# Altium PCB remora-2.PcbDoc (part 1 of 2)
Units mm, origin at the board's own origin, x right, y up, seen from the top; angles counter-clockwise.
Board outline 127 x 44.45 mm, 4 copper layers (Top Layer, GND, VCC, Bottom Layer), stack 0.778 mm thick; 128 components, 115 nets, 566 pads, 152 vias.
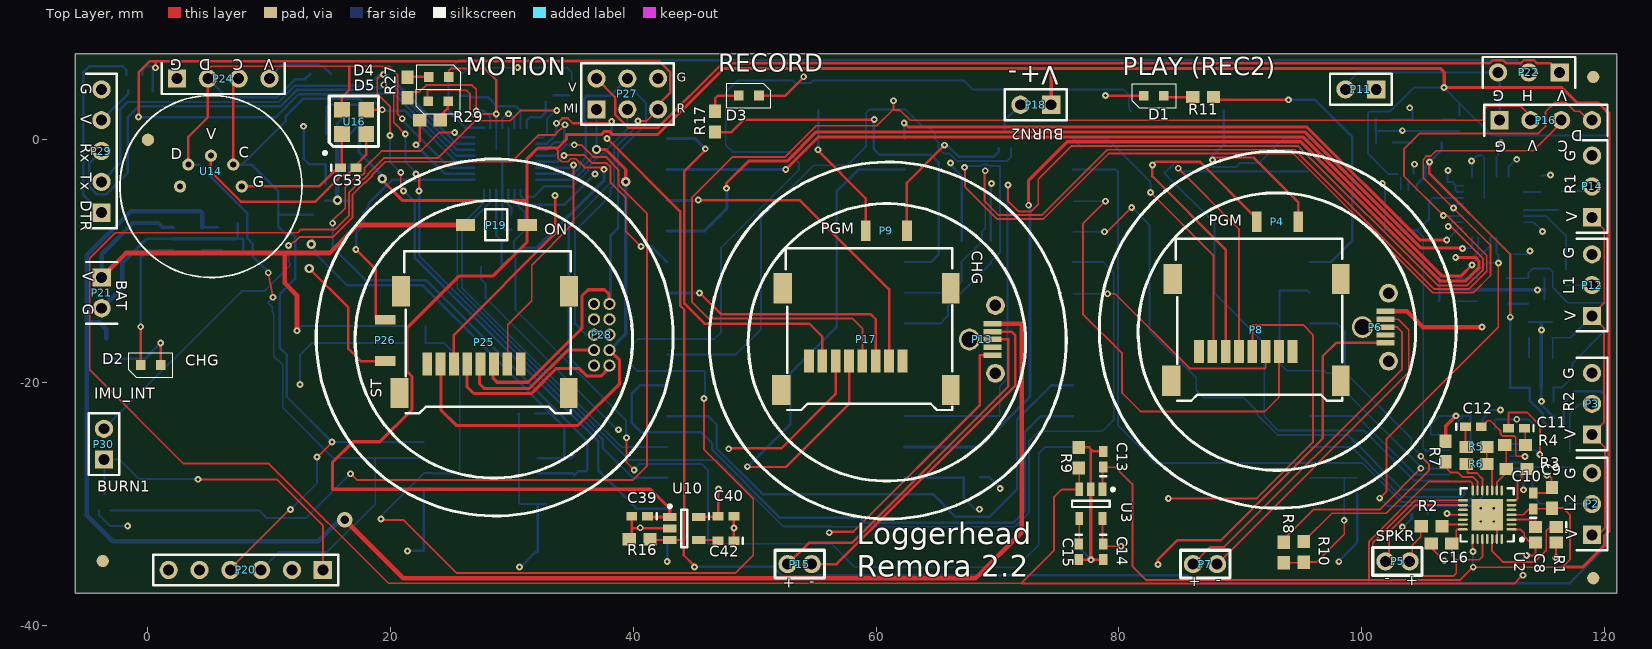
[diagram p0: Top Layer view]
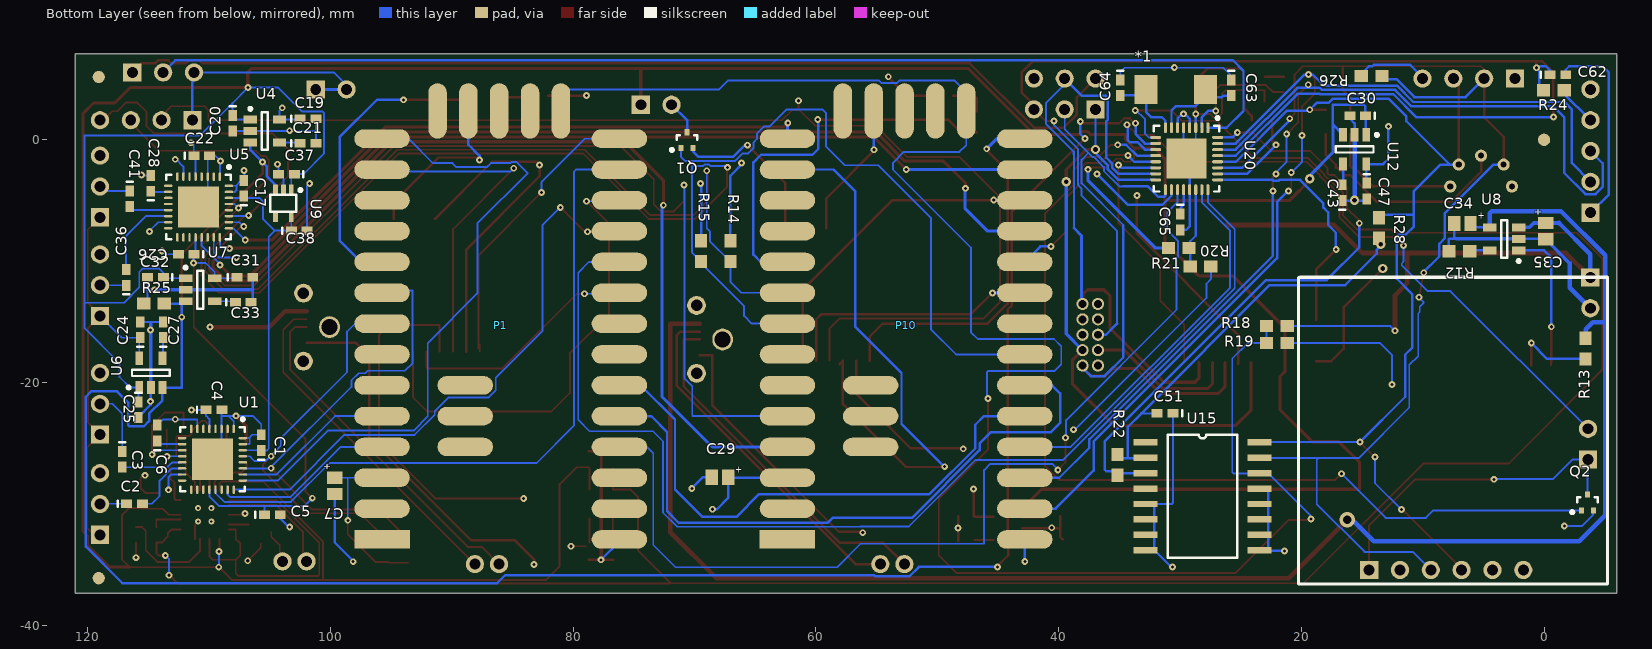
[diagram p1: Bottom Layer view, seen from below]
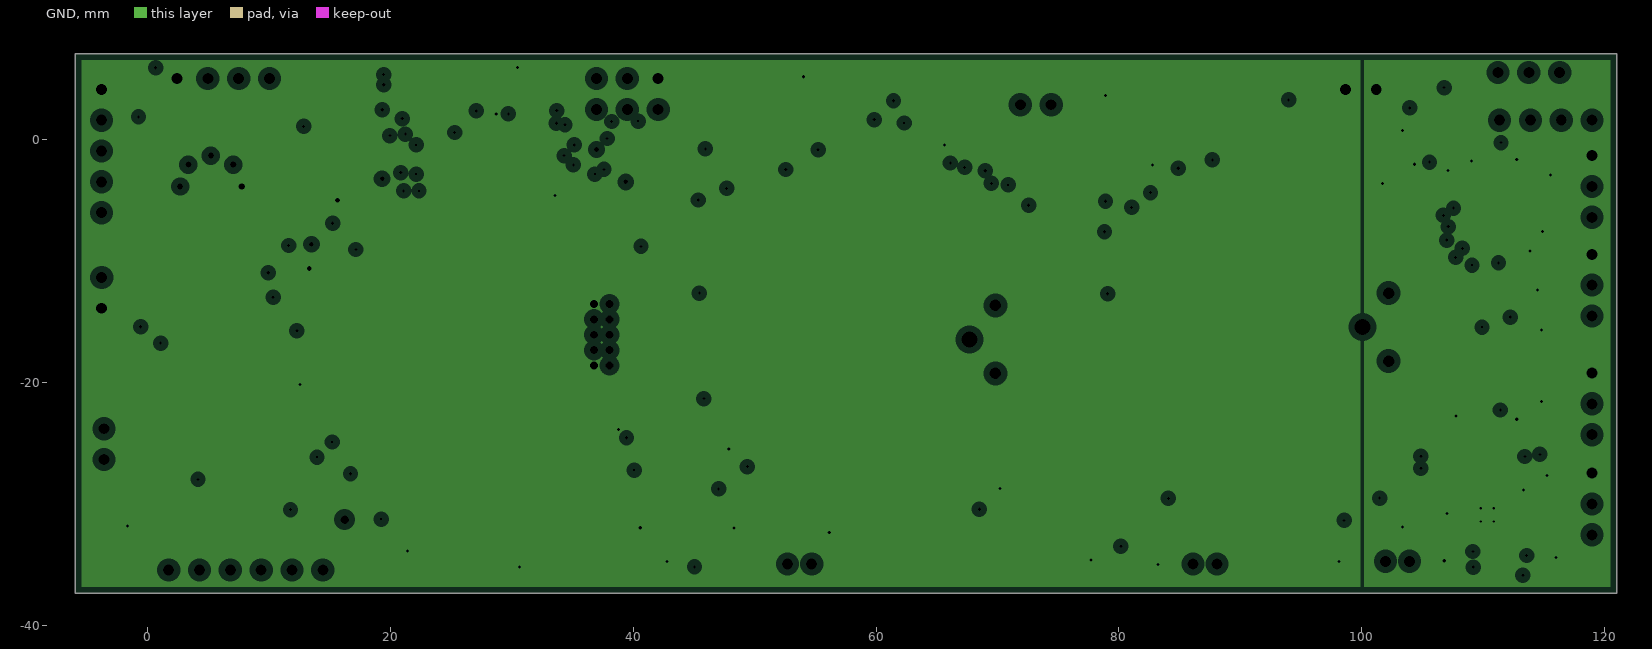
[diagram p2: GND, clearances drawn from the general rule]
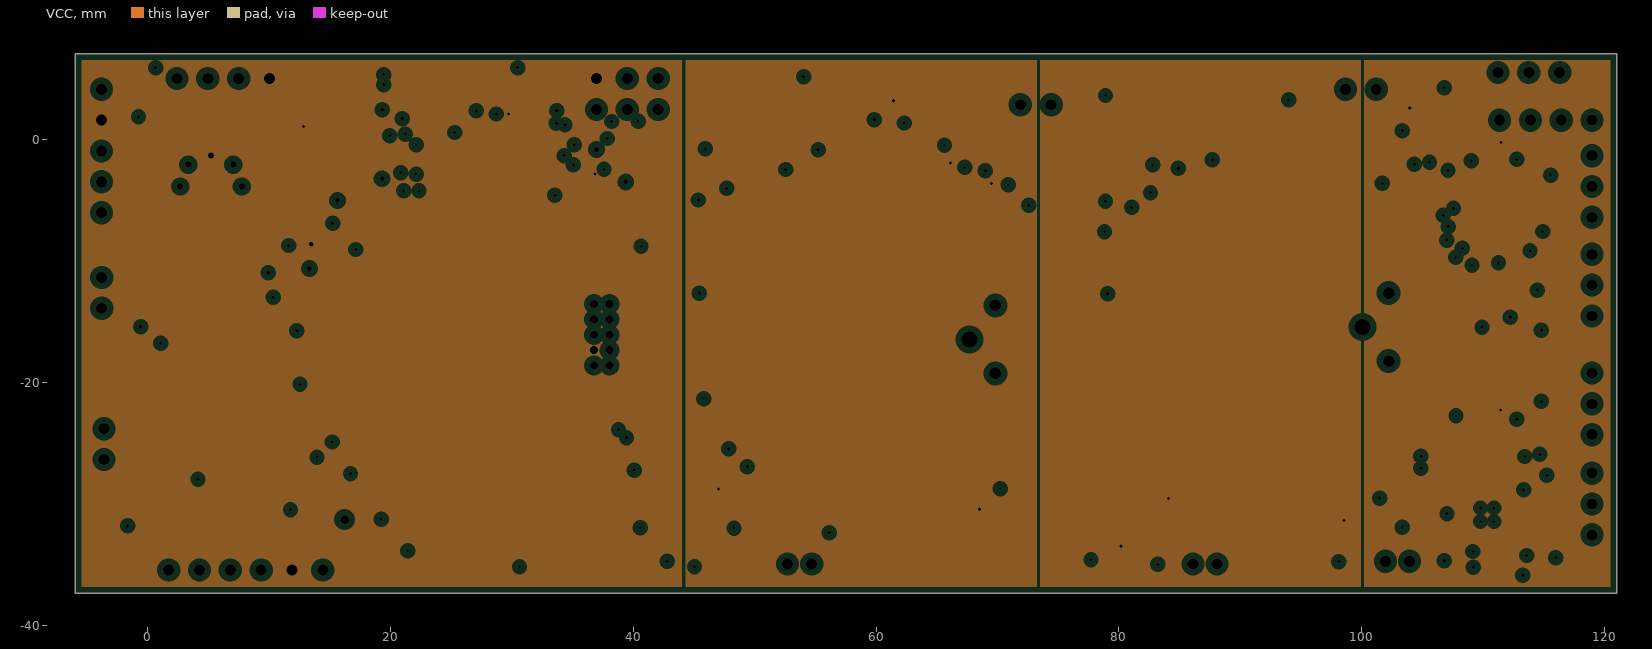
[diagram p3: VCC, clearances drawn from the general rule]

## Layer stack, top to bottom
Top Solder: solder mask 0.0102, Solder Resist, Dk 3.5
Top Layer: signal copper 0.0356
Dielectric 1: core 0.254, FR-4, Dk 4.2
GND: plane copper 0.036, net (Multiple Nets)
Dielectric 3: prepreg 0.127, Dk 4.2
VCC: plane copper 0.036, net (Multiple Nets)
Dielectric 2: core 0.254, Dk 4.2
Bottom Layer: signal copper 0.0356
Bottom Solder: solder mask 0.0102, Solder Resist, Dk 3.5

## Board outline
-5.986,-37.373 -5.986,7.077 121.014,7.077 121.014,-37.373

## Design rules (kind name [scope] priority, off if disabled: settings)
Clearance [All] p1: gap=0.152 ignorepadtopadclearanceinfootprint=FALSE except(0: Arc-Hole Track-Hole SMDPad-Hole THPad-Hole Via-Hole Fill-Hole Poly-Hole Region-Hole Text-Hole)
MinimumSolderMaskSliver [All] p1: minsoldermaskwidth=0.051
PlaneClearance [All] p1: clearance=0.508
PlaneConnect [All] p1: planeconnectstyle=Relief reliefexpansion=0.508 reliefentries=4 reliefconductorwidth=0.254 reliefairgap=0.254
PolygonConnect [All] p1: connectstyle=Relief reliefconductorwidth=0.254 reliefentries=4 polygonreliefangle="90 Angle" airgapwidth=0.254
RoutingVias [All] p1: holewidth=0.381 width=0.762 viastyle="Through Hole" minholewidth=0.254 minwidth=0.508 maxholewidth=1.016 maxwidth=1.27
SilkToSilkClearance [All] p1: silktosilkclearance=0
SilkToSolderMaskClearance [IsPad] p1: minsilkscreentomaskgap=0 clearancetoexposedcopper=TRUE
SolderMaskExpansion [All] p1: expansion=0.102 istentingtop=FALSE
Width [All] p1: maxlimit=1.27 minlimit=0.152 preferedwidth=0.203
25 further rules are at their usual default settings.

## Classes and differential pairs
component class teensyRecord: C17 C19 C20 C21 C22 C24 C25 C26 C27 C28 C29 C31 C32 C33 C34 C35 C36 C37 C38 C39 C40 C41 C42 D2 D3 P9 P10 P11 P12 P13 P14 P15 P16 P17 P18 Q1 R12 R13 R14 R15 R16 R17 R25 U4 U5 U6 U7 U8 U9 U10
component class teensyPlayback: C1 C2 C3 C4 C5 C6 C7 C8 C9 C10 C11 C12 C13 C14 C15 C16 D1 P1 P2 P3 P4 P5 P6 P7 P8 R1 R2 R3 R4 R5 R6 R7 R8 R9 R10 R11 U1 U2 U3
component class remora-2-power: C30 C43 C47 P19 P21 R18 R19 R20 R21 U12
component class remora-2-sensors: C51 C53 P20 P22 P24 P30 Q2 R22 U14 U15 U16
component class remora-2: *1 C62 C63 C64 C65 D4 D5 P25 P26 P27 P28 P29 R24 R26 R27 R28 R29 U20

## Components (designator, comment, footprint, x,y, rotation, side; value= is the part's Value field where it differs from the comment)
*1 "8MHz" XTAL-ABM3 30.352,4.156 r0 bottom
C1 "0.1uF" 0402 105.688,-24.953 r90 bottom
C2 "1.0uF" 0402 116.128,-29.982 r180 bottom value=0.1uF
C3 "1.0uF" 0402 117.144,-26.324 r270 bottom value=0.1uF
C4 "0.1uF" 0402 109.584,-22.26 r180 bottom
C5 "0.1uF" 0402 104.774,-30.896 r180 bottom
C6 "0.1uF" 0402 114.274,-24.165 r90 bottom
C7 "10uF" Tant0805 99.643,-28.509 r90 bottom
C8 "C0603" 0603 115.172,-31.912 r180 top value=4.7uF
C9 "C0603" 0603 115.68,-29.499 r270 top value=10uF
C10 "0.1uF" 0402 114.156,-29.753 r90 top
C11 ".47uF" 0402 112.759,-23.784 r180 top value=0.1uF
C12 "0.47uF" 0402 109.203,-23.657 r0 top value=0.1uF
C13 "1uF" 0402 78.723,-26.324 r90 top value=0.1uF
C14 "1uF" 0402 78.723,-33.944 r270 top value=0.1uF
C15 "0.01uF" 0402 76.691,-33.944 r270 top value=0.1uF
C16 "C0603" 0603 106.577,-33.258 r0 top value=10uF
C17 "0.1uF" 0402 107.136,-3.998 r90 bottom
C19 "1.0uF" 0402 101.837,1.743 r180 bottom value=0.1uF
C20 "1uF" 0402 108.06,1.362 r270 bottom value=0.1uF
C21 "0.01uF" 0402 101.837,-0.289 r180 bottom value=0.1uF
C22 "0.1uF" 0402 110.6,-1.305 r180 bottom
C24 "1.0uF" 0402 115.68,-15.656 r90 bottom value=0.1uF
C25 "1uF" 0402 115.807,-22.245 r270 bottom value=0.1uF
C26 "0.1uF" 0402 111.87,-9.433 r0 bottom
C27 "0.01uF" 0402 113.775,-15.656 r90 bottom value=0.1uF
C28 "0.1uF" 0402 114.791,-3.591 r90 bottom
C29 "10uF" Tant0805 67.893,-27.797 r180 bottom
C30 "1.0uF" 0402 15.35,1.997 r0 bottom value=0.1uF
C31 "1.0uF" 0402 107.044,-11.338 r180 bottom value=0.1uF
C32 "1uF" 0402 114.41,-11.338 r0 bottom value=0.1uF
C33 "0.01uF" 0402 107.171,-13.37 r180 bottom value=0.1uF
C34 "1uF" Tant0805 6.73,-6.893 r180 bottom
C35 "1uF" Tant0805 -0.144,-7.528 r90 bottom
C36 "1.0uF" 0402 116.823,-11.338 r90 bottom value=0.1uF
C37 "1.0uF" 0402 103.615,-2.829 r0 bottom value=0.1uF
C38 "1.0uF" 0402 102.564,-7.477 r180 bottom value=0.1uF
C39 "1uF" 0402 40.512,-31.023 r180 top value=0.1uF
C40 "1uF" 0402 47.624,-31.007 r0 top value=0.1uF
C41 "1.0uF" 0402 116.509,-4.861 r270 bottom value=0.1uF
C42 ".01uF" 0402 47.624,-33.039 r180 top value=0.1uF
C43 "0.01uF" 0402 16.62,-4.353 r90 bottom value=0.1uF
C47 "1.ouF" 0402 14.604,-4.226 r270 bottom value=0.1uF
C51 "0.1uF" 0402 31.225,-22.54 r0 bottom value=10nF
C53 "0.1uF" 0402 16.509,-2.321 r0 top
C62 "0.1uF" 0402 -1.135,5.35 r180 bottom
C63 "100pF" 0402 25.779,4.283 r270 bottom
C64 "100pF" 0402 34.924,4.283 r270 bottom
C65 "0.1uF" 0402 29.955,-6.766 r270 bottom
D1 "LED_0603" Diode0603 82.879,3.622 r180 top
D2 "LED_0603" Diode0603 0.237,-18.552 r180 top
D3 "LED_0603" Diode0603 49.513,3.648 r0 top
D4 "LED_0603" Diode0603 23.961,5.172 r0 top
D5 "LED_0603" Diode0603 23.91,3.165 r180 top
P1 "Teensy Surface" TEENSY3.2_surface_mount 85.962,-15.275 r180 bottom
P2 "HYDROPHONE" HDR1X3 118.982,-32.547 r90 top
P3 "HYDROPHONE" HDR1X3 118.982,-24.292 r90 top
P4 "Tactile" Tactile-B3U-1000 93.065,-6.766 r0 top
P5 "PIEZO" HDR_2x1_2mm 103.961,-34.732 r90 top
P6 "microUSB-vert" MICROUSB-VERT 101.964,-14.132 r270 top
P7 "USB" HDR_2x1_2mm 86.089,-34.96 r270 top
P8 "microSD-Molex" microSD_Molex_hinged 84.819,-19.847 r90 top
P9 "Tactile" Tactile-B3U-1000 60.832,-7.503 r180 top
P10 "Teensy Surface" TEENSY3.2_surface_mount 52.561,-15.275 r180 bottom
P11 "GND Tie" HDR1X2 101.202,4.156 r180 top
P12 "HYDROPHONE" HDR1X3 118.982,-14.513 r90 top
P13 "microUSB-vert" MICROUSB-VERT 69.579,-15.148 r270 top
P14 "HYDROPHONE" HDR1X3 118.982,-6.385 r90 top
P15 "USB" HDR_2x1_2mm 52.688,-34.96 r270 top
P16 "Display" HDR1X4 111.362,1.616 r0 top
P17 "microSD-Molex" microSD_Molex_hinged 52.688,-20.609 r90 top
P18 "Battery" HDR1X2 74.421,2.886 r180 top
P19 "DIP1" DIP1 26.161,-7.02 r0 top
P20 "Header 6" HDR1X6 14.41,-35.443 r180 top
P21 "Battery" HDR1X2 -3.811,-11.338 r270 top
P22 "Header 3" HDR1X3 116.315,5.553 r180 top
P24 "Header 4" HDR1X4 2.396,5.045 r0 top
P25 "microSD-Molex" microSD_Molex_hinged 21.233,-20.863 r90 top
P26 "Tactile" Tactile-B3U-1000 19.557,-16.52 r90 top
P27 "AVR SPI" HDR2X3 36.956,2.505 r0 top
P28 "Custom program 2x5" Header_2x5_50mil 38.023,-13.523 r180 top
P29 "Header 5" HDR1X5 -3.827,-6.004 r90 top
P30 "Header 2" HDR1X2 -3.624,-26.35 r90 top
Q1 "DMN5L06TK-7" SOT-523 70.611,-0.035 r90 bottom
Q2 "DMN5L06TK-7" SOT-523 -3.573,-29.88 r90 bottom
R1 "20k" 3-0603 115.172,-33.182 r180 top
R2 "10X" 3-0603 105.765,-31.836 r180 top
R3 "10K" 3-0603 112.775,-27.137 r0 top
R4 "10K" 3-0603 112.648,-25.156 r180 top
R5 "10K" 3-0603 109.457,-25.308 r0 top
R6 "10K" 3-0603 109.457,-26.705 r180 top
R7 "100K" 3-0603 106.917,-25.689 r270 top
R8 "4.7k" 3-0603 93.582,-33.995 r270 top
R9 "20k" 3-0603 76.691,-26.197 r270 top
R10 "4.7k" 3-0603 95.233,-33.944 r270 top
R11 "330" 3-0603 86.943,3.521 r180 top
R12 "2k" 3-0603 6.984,-9.179 r180 bottom
R13 "330" 3-0603 -3.421,-17.206 r270 bottom
R14 "4.7k" 3-0603 67.039,-9.179 r90 bottom
R15 "4.7k" 3-0603 69.452,-9.179 r90 bottom
R16 "20k" 3-0603 40.512,-32.912 r0 top
R17 "330" 3-0603 46.735,1.489 r90 top
R18 "33k" 3-0603 22.021,-15.351 r180 bottom
R19 "100k" 3-0603 22.021,-16.748 r0 bottom
R20 "33k" 3-0603 30.098,-8.925 r0 bottom
R21 "100k" 3-0603 28.304,-10.449 r0 bottom
R22 "4.7k" 3-0603 35.137,-26.781 r270 bottom
R24 "10k" 3-0603 -0.804,4.08 r180 bottom
R25 "20k" 3-0603 114.537,-13.497 r0 bottom
R26 "4.7k" 3-0603 14.207,5.248 r0 bottom
R27 "330" 3-0603 21.395,4.308 r90 top
R28 "4.7k" 3-0603 13.588,-7.274 r270 bottom
R29 "330" 3-0603 23.24,1.616 r0 top
U1 "SGTL5000" QFN32 109.711,-26.324 r270 bottom
U2 "MAX9788" MAX9788 110.346,-30.896 r180 top
U3 "LP3985IM5-3.3" MF05A_N 77.683,-30.003 r270 top
U4 "LP3985IM5-3.3" MF05A_N 105.393,0.727 r180 bottom
U5 "SGTL5000" QFN32 110.854,-5.54 r270 bottom
U6 "LP3985IM5-3.3" MF05A_N 114.791,-19.212 r90 bottom
U7 "LP3985IM5-3.3" MF05A_N 110.727,-12.354 r180 bottom
U8 "MCP73831T-2DCI/OT" SOT-23-OT5_N 3.285,-8.163 r0 bottom
U9 "TLV70018DCKR" TI-DCK5_V 103.869,-5.242 r270 bottom
U10 "LP3985IM5-3.3" MF05A_N 44.195,-32.023 r0 top
U12 "LP3985IM5-3.3" MF05A_N 15.604,-0.797 r270 bottom
U14 "Keller7LD" Keller7LD 7.73,-3.845 r180 top
U15 "DS3231" DS3231 32.825,-24.927 r180 bottom
U16 "MS5837" MS5837 15.985,0.473 r90 top
U20 "ATmega8-16AC" 32M1-A_M 29.447,-1.559 r270 bottom

## Footprints (in the part's own frame and the unit in brackets; to place one, negate y for a bottom-side part, rotate by r counter-clockwise, add the part's x,y. Pads: shape width x height; smd on the part's side, far side on the other; paste and mask are expansions set on the pad)
3-0603 [mm] "Chip Resistor; Body 1.6 x 0.9 mm (LxW typ)"
  rect 1.1x1 smd: 1(-0.85,0) 2(0.85,0)
32M1-A_M [mm] "QFN, 32-Leads, Body 5x5mm, Pitch 0.5mm, Thermal Pad 3.3x3.3mm, IPC Low Density"
  oval 0.9x0.25 smd: 1(-2.55,1.75) 2(-2.55,1.25) 3(-2.55,0.75) 4(-2.55,0.25) 5(-2.55,-0.25) 6(-2.55,-0.75) 7(-2.55,-1.25) 8(-2.55,-1.75) 17(2.55,-1.75) 18(2.55,-1.25) 19(2.55,-0.75) 20(2.55,-0.25) 21(2.55,0.25) 22(2.55,0.75) 23(2.55,1.25) 24(2.55,1.75)
  oval 0.25x0.9 smd: 9(-1.75,-2.55) 10(-1.25,-2.55) 11(-0.75,-2.55) 12(-0.25,-2.55) 13(0.25,-2.55) 14(0.75,-2.55) 15(1.25,-2.55) 16(1.75,-2.55) 25(1.75,2.55) 26(1.25,2.55) 27(0.75,2.55) 28(0.25,2.55) 29(-0.25,2.55) 30(-0.75,2.55) 31(-1.25,2.55) 32(-1.75,2.55)
  rect 3.3x3.3 smd paste-1.27: 33(0,0)
  silkscreen extent -3.47,-2.7 2.7,2.7, body extent -2.55,-2.55 2.55,2.55, height 1
0402 [mm] "Chip Capacitor; Body 1.0 x 0.5 mm (LxW typ)"
  rect 0.9x0.7 smd: 1(-0.65,0) 2(0.65,0)
  silkscreen extent -1.4,-0.25 -1.4,0.25
0603 [mm] "Chip Capacitor; Body 1.6 x 0.8 mm (LxW typ)"
  rect 1.1x1 smd: 1(-0.85,0) 2(0.85,0)
  silkscreen extent -1.7,-0.4 -1.7,0.4
Diode0603 [mm]
  rect 0.8x0.8 smd: A(-0.825,0) K(0.825,0)
  silkscreen extent -1.83,-1 1.8,1
DIP1 [mm]
  rect 1.6x1 smd: 1(0,0) 2(5.08,0)
  silkscreen extent 1.63,-1.25 3.45,1.29
DS3231 [mm]
  rect 1.98x0.53 smd: 1(0,0) 2(0,-1.27) 3(0,-2.54) 4(0,-3.81) 5(0,-5.08) 6(0,-6.35) 7(0,-7.62) 8(0,-8.89) 9(9.37,-8.89) 10(9.37,-7.62) 11(9.37,-6.35) 12(9.37,-5.08) 13(9.37,-3.81) 14(9.37,-2.54) 15(9.37,-1.27) 16(9.37,0)
  silkscreen extent 1.83,-9.53 7.54,0.63
HDR1X2 [mm] "Connector; Header; 2 Position"
  rect 1.5x1.5 hole 0.9: 1(0,0)
  round 1.5 hole 0.9: 2(2.54,0)
  silkscreen extent -1.27,-1.27 3.81,1.27
HDR1X3 [mm] "Connector; Header; 3 Position"
  rect 1.5x1.5 hole 0.9: 1(0,0)
  round 1.5 hole 0.9: 2(2.54,0) 3(5.08,0)
  silkscreen extent -1.27,-1.27 6.35,1.27
HDR1X4 [mm] "Connector; Header; 4 Position"
  rect 1.5x1.5 hole 0.9: 1(0,0)
  round 1.5 hole 0.9: 2(2.54,0) 3(5.08,0) 4(7.62,0)
  silkscreen extent -1.27,-1.27 8.89,1.27
HDR1X5 [mm] "Connector; Header; 5 Position"
  rect 1.5x1.5 hole 0.9: 1(0,0)
  round 1.5 hole 0.9: 2(2.54,0) 3(5.08,0) 4(7.62,0) 5(10.16,0)
  silkscreen extent -1.27,-1.27 11.43,1.27
HDR1X6 [mm] "Connector; Header; 6 Position"
  rect 1.5x1.5 hole 0.9: 1(0,0)
  round 1.5 hole 0.9: 2(2.54,0) 3(5.08,0) 4(7.62,0) 5(10.16,0) 6(12.7,0)
  silkscreen extent -1.27,-1.27 13.97,1.27
HDR2X3 [mm] "Connector; Header; 3x2 Position"
  rect 1.5x1.5 hole 0.9: 1(0,0)
  round 1.5 hole 0.9: 2(0,2.54) 3(2.54,0) 4(2.54,2.54) 5(5.08,0) 6(5.08,2.54)
  silkscreen extent -1.27,-1.27 6.35,3.81
HDR_2x1_2mm [mm]
  round 1.5 hole 0.9: 1(0,0.016) 2(0,2)
  silkscreen extent -1.14,-1.02 1.14,3.05
Header_2x5_50mil [mm]
  round 1 hole 0.65: 1(0,0) 2(1.27,0) 3(0,1.27) 4(1.27,1.27) 5(0,2.54) 6(1.27,2.54) 7(0,3.81) 8(1.27,3.81) 9(0,5.08) 10(1.27,5.08)
Keller7LD [mm]
  round 1 hole 0.5: 1(5.08,0) 2(4.4,-1.8) 3(2.54,-2.54) 4(0.7,-1.8) 5(0,0)
  silkscreen extent -4.96,-7.5 10.04,7.5, body extent -4.94,-7.49 10,7.49, height 5.25
MAX9788 [mm] "QFN, 28-Leads, Body 4.00x4.00mm, Pitch 0.40mm, Thermal Pad 2.60x2.60mm, IPC Medium Density"
  oval 0.8x0.2 smd: 1(-2,1.2) 2(-2,0.8) 3(-2,0.4) 4(-2,0) 5(-2,-0.4) 6(-2,-0.8) 7(-2,-1.2) 15(2,-1.2) 16(2,-0.8) 17(2,-0.4) 18(2,0) 19(2,0.4) 20(2,0.8) 21(2,1.2)
  oval 0.2x0.8 smd: 8(-1.2,-2) 9(-0.8,-2) 10(-0.4,-2) 11(0,-2) 12(0.4,-2) 13(0.8,-2) 14(1.2,-2) 22(1.2,2) 23(0.8,2) 24(0.4,2) 25(0,2) 26(-0.4,2) 27(-0.8,2) 28(-1.2,2)
  rect 2.6x2.6 smd paste-0.635: 29(0,0)
  silkscreen extent -2.98,-2.2 2.2,2.2, body extent -2.05,-2.05 2.05,2.05, height 0.75
MF05A_N [mm] "SOT23, 5-Leads, Body 2.9x1.6mm, Pitch 0.95mm, Lead Span 2.8mm, IPC Medium Density"
  rect 1.1x0.65 smd: 1(-1.2,0.95) 2(-1.2,0) 3(-1.2,-0.95) 4(1.2,-0.95) 5(1.2,0.95)
  silkscreen extent -1.32,-1.55 0.25,1.95, body extent -0.9,-1.55 0.9,1.55, height 1.19
microSD_Molex_hinged [mm]
  rect 2.5x1.5 smd: 0(0,0.508) 0(8.382,0.381)
  rect 2.5x1.45 smd: 0(0,-13.45) 0(8.382,-13.462)
  rect 1.9x0.8 smd: 1(2.4,-9.475) 2(2.4,-8.375) 3(2.4,-7.275) 4(2.4,-6.175) 5(2.4,-5.075) 6(2.4,-3.975) 7(2.4,-2.875) 8(2.4,-1.775)
  silkscreen extent -1.65,-13.59 11.68,0.13
MICROUSB-VERT [mm] "Molex 05133-0011"
  rect 0.45x1.5 smd: 1(0,0) 2(0.65,0) 3(1.3,0) 4(1.95,0) 5(2.6,0)
  round 1.55 hole 0.95: ""(-1.5,0.25) ""(4.1,0.25)
  oval 1.8x1.7 hole 1.3: ""(1.3,-1.9)
  body extent -2.67,-3.05 5.35,1.4, height 7.53
MS5837 [mm]
  rect 1.3x1.3 smd: 1(0,0) 2(0,-2) 3(2,-2) 4(2,0)
  silkscreen extent -1.67,-3 3.15,1.52
QFN32 [mm]
  oval 0.7x0.2 smd: 1(-2.5,1.75) 2(-2.5,1.25) 3(-2.5,0.75) 4(-2.5,0.25) 5(-2.5,-0.25) 6(-2.5,-0.75) 7(-2.5,-1.25) 8(-2.5,-1.75) 17(2.5,-1.75) 18(2.5,-1.25) 19(2.5,-0.75) 20(2.5,-0.25) 21(2.5,0.25) 22(2.5,0.75) 23(2.5,1.25) 24(2.5,1.75)
  oval 0.2x0.7 smd: 9(-1.75,-2.5) 10(-1.25,-2.5) 11(-0.75,-2.5) 12(-0.25,-2.5) 13(0.25,-2.5) 14(0.75,-2.5) 15(1.25,-2.5) 16(1.75,-2.5) 25(1.75,2.5) 26(1.25,2.5) 27(0.75,2.5) 28(0.25,2.5) 29(-0.25,2.5) 30(-0.75,2.5) 31(-1.25,2.5) 32(-1.75,2.5)
  rect 3.4x3.4 smd paste-1.2: 33(0,0)
  silkscreen extent -3.42,-2.65 2.65,2.65, body extent -2.5,-2.5 2.5,2.5, height 1
SOT-23-OT5_N [mm] "SOT23, 5-Leads, Body 2.9x1.7mm, Pitch 0.95mm, Lead Span 2.8mm, IPC Medium Density"
  rect 1.1x0.65 smd: 1(-1.2,0.95) 2(-1.2,0) 3(-1.2,-0.95) 4(1.2,-0.95) 5(1.2,0.95)
  silkscreen extent -1.32,-1.55 0.25,1.95, body extent -0.9,-1.55 0.9,1.55, height 1.45
SOT-523 [mm] "For Diodes Inc MOSFET DMN5L06TK"
  rect 0.51x0.4 smd: 1(-0.65,0.5) 2(-0.65,-0.5) 3(0.65,0)
  silkscreen extent -0.92,-0.85 0.42,1.38, body extent -0.43,-0.85 0.42,0.85, height 0.8
Tactile-B3U-1000 [mm]
  rect 0.8x1.7 smd: 1(-1.7,0) 2(1.7,0)
Tant0805 [mil]
  rect 40x50 smd: 1(-26.5,0) 2(26.5,0)
TEENSY3.2_surface_mount [mil]
  oval 180x60 smd: 0(385,-595) 1(385,-495) 2(385,-395) 3(385,-295) 4(385,-195) 5(385,-95) 6(385,5) 7(385,105) 8(385,205) 9(385,305) 10(385,405) 11(385,505) 12(385,605) 13(-385,605) 14(-385,505) 15(-385,405) 16(-385,305) 17(-385,205) 18(-385,105) 19(-385,5) 20(-385,-95) 21(-385,-195) 22(-385,-295) 23(-385,-395) A10(-115,-295) A11(-115,-195) AGND(-385,-595) AREF(-115,-395) GND(385,-695)
  oval 180x60 smd paste+0: 3.3V(-385,-495)
  oval 60x180 smd: 3.3V2(95,695) A14(-205,695) GND2(-5,695) PGM(-105,695) VBat(195,695)
  rect 180x60 smd: Vin(-385,-695)
TI-DCK5_V [mm] "SOT23, 5-Leads, Body 2x1.25mm, Pitch 0.65mm"
  rect 0.9x0.4 smd: 1(-1.1,0.65) 2(-1.1,0) 3(-1.1,-0.65) 4(1.1,-0.65) 5(1.1,0.65)
  silkscreen extent -1.22,-1.07 0.7,1.52, body extent -0.63,-1 0.63,1, height 1.1
XTAL-ABM3 [mm]
  rect 1.9x2.4 smd: 1(-2.45,0) 2(2.45,0)

## Part data
*1: library part XTAL-ABM3
C1 C2 C3 C4 C5 C6 C10 C11 C12 C13 C14 C15 C17 C19 C20 C21 C22 C24 C25 C26 C27 C28 C30 C31 C32 C33 C36 C37 C38 C39 C40 C41 C42 C43 C47 C51 C53 C62 C63 C64 C65: library part C0402, "Ceramic Chip Capacitor - Standard", PackageDocument=Mar-2001, Code_IPC="1005 [0402]", Code_JEITA=0402, ComponentLink1Description="Manufacturer Link", ComponentLink1URL=http://www.kemet.com/, ComponentLink2Description=Datasheet, ComponentLink2URL=http://www.kemet.com/kemet/web/homepage/kechome.nsf/vapubfilesname/F3102TA.pdf/$file/F3102TA.pdf, DatasheetDocument=Mar-2001, LatestRevisionDate=19-Mar-2004, LatestRevisionNote="Silkscreen size reduced.", Note="Footprint corresponds to dimensions for bulk cassette packaging. This case size has tightened tolerances.", PackageReference=0402, Published=17-Jul-2002, Publisher="Altium Limited"
C7 C29 C34 C35: library part Tant0805
C8 C9 C16: "Ceramic Chip Capacitor - Standard", PackageDocument=Mar-2001, Code_IPC="1608 [0603]", Code_JEITA=0603, ComponentLink1Description="Manufacturer Link", ComponentLink1URL=http://www.kemet.com/, ComponentLink2Description=Datasheet, ComponentLink2URL=http://www.kemet.com/kemet/web/homepage/kechome.nsf/vapubfilesname/F3102TA.pdf/$file/F3102TA.pdf, DatasheetDocument=Mar-2001, LatestRevisionDate=19-Mar-2004, LatestRevisionNote="Silkscreen size reduced.", Note="Footprint corresponds to dimensions for bulk cassette packaging. This case size has tightened tolerances.", PackageReference=0603, Published=17-Jul-2002, Publisher="Altium Limited"
P1 P10: library part Teensy3.2_surface_mount
P2 P3 P12 P14: library part "Header 3", "Header, 3-Pin", LatestRevisionDate=17-Jul-2002, LatestRevisionNote="Re-released for DXP Platform.", Publisher="Altium Limited"
P4 P9 P26: library part Tactile_B3U-1000, Supplier Part Number 1=SW1020TR-ND, Supplier 1=Digi-Key
P5 P7 P15: library part HDR_2x1_2mm, "Charging Connector"
P6 P13: "Molex 105133-0011"
P8 P17 P25: library part microSD_Molex_hinged, Supplier Part Number 1=WM19081DKR-ND, Supplier 1=Digi-Key
P11 P18 P21: library part "Header 2", "Header, 2-Pin", LatestRevisionDate=17-Jul-2002, LatestRevisionNote="Re-released for DXP Platform.", Publisher="Altium Limited"
P16: library part "Header 4", "Header, 4-Pin", LatestRevisionDate=17-Jul-2002, LatestRevisionNote="Re-released for DXP Platform.", Publisher="Altium Limited"
P19: Supplier Part Number 1=563-1003-6-ND, Supplier 1=Digi-Key
P20: "Header, 6-Pin", LatestRevisionDate=17-Jul-2002, LatestRevisionNote="Re-released for DXP Platform.", Publisher="Altium Limited"
P22: "Header, 3-Pin", LatestRevisionDate=17-Jul-2002, LatestRevisionNote="Re-released for DXP Platform.", Publisher="Altium Limited"
P24: "Header, 4-Pin", LatestRevisionDate=17-Jul-2002, LatestRevisionNote="Re-released for DXP Platform.", Publisher="Altium Limited"
P27: library part "Header 3X2", "Header, 3-Pin, Dual row", LatestRevisionDate=17-Jul-2002, LatestRevisionNote="Re-released for DXP Platform.", Publisher="Altium Limited"
P28: library part CortexDebug
P29: "Header, 5-Pin", LatestRevisionDate=17-Jul-2002, LatestRevisionNote="Re-released for DXP Platform.", Publisher="Altium Limited"
P30: "Header, 2-Pin", LatestRevisionDate=17-Jul-2002, LatestRevisionNote="Re-released for DXP Platform.", Publisher="Altium Limited"
Q1 Q2: library part "FET DMN5L06TK-7", "Ultra-low leakage Enhanced MOSFET", Supplier Part Number 1=DMN5L06TKDICT-ND, Creator and Date="Will Flanery 2010-09-02", Fabrication Tested=NO, HelpURL=http://www.diodes.com/datasheets/ds30926.pdf, Supplier 1=Digi-Key
R1 R2 R3 R4 R5 R6 R7 R8 R9 R10 R11 R12 R13 R14 R15 R16 R17 R18 R19 R20 R21 R22 R24 R25 R26 R27 R28 R29: library part ERJ3RK, "Precision Thick Film Chip Resistor, 10 Ohm to 1M Ohm Range, 1% and 0.5% Tolerance, 0603 Size, 0.063 W", PackageDocument=Mar-2003, Code_IPC="1608 [0603]", ComponentLink1Description="Manufacturer Link", ComponentLink1URL=http://www.panasonic.com/industrial/components/resistive_products.htm, ComponentLink2Description=Datasheet, ComponentLink2URL=http://www.panasonic.com/industrial/components/pdf/AOA0000CE2.pdf, LatestRevisionDate=19-Mar-2004, LatestRevisionNote="Silkscreen size reduced.", PackageReference=3-0603, Published=17-Dec-2003, Publisher="Altium Limited"
U2: "audio amp"
U3 U4 U6 U7 U10 U12: "Micropower, 150mA Low-Noise Ultra Low-Dropout CMOS Voltage Regulator", DigiKeyPartNumber=LP3985IM5-3.3CT-ND, Manufacturer="National Semiconductor", PackageTopMarking=LDQB*XTT, PowerWise=N, ComponentLink1Description="LP3985 Datasheet", ComponentLink1URL=http://www.national.com/ds/LP/LP3985.pdf, ComponentLink2Description="LP3985 Web Page", ComponentLink2URL=http://www.national.com/pf/LP/LP3985.html, ComponentLink3Description="MF05A Package Page", ComponentLink3URL=http://www.national.com/packaging/folders/mf05a.html, CompType="LDO IC", DatasheetVersion=Aug-2005, PackageDescription="Molded SOT-23, .115 x .063 x .040 in Body, 5 Lead, .0375 in Pitch", PackageReference=MF05A, PackageVersion="revD, Aug-2008", PartNumber=LP3985IM5-3.3, PinCount=5, Published=4-Dec-2008, Publisher="Altium Limited", RoHS=O
U8: "Miniature Single-Cell, Fully Integrated Li-Ion, Li-Polymer Charge Management Controller, 4.2V, 5-Pin SOT-23, Industrial Temperature, Tape and Reel", Code_IPC=SOT23-5, ComponentLink1Description="Manufacturer URL", ComponentLink1URL=http://www.microchip.com/, ComponentLink2Description=Datasheet, ComponentLink2URL=http://ww1.microchip.com/downloads/en/DeviceDoc/21984e.pdf, ComponentLink3Description="Package Specification", ComponentLink3URL=http://www.microchip.com/stellent/groups/techpub_sg/documents/packagingspec/en012702.pdf, DatasheetVersion="revE, Sep-2008", PackageDescription="5-Lead Plastic Small Outline Transistor (OT) [SOT-23]", PackageReference=SOT-23-OT5, PackageVersion="revBB, Aug-2009"
U9: "Single Output LDO, 200 mA, Fixed 1.8 V Output, 2 to 5.5 V Input, with Low IQ, 5-pin SC70 (DCK), -40 to 125 degC, Green (RoHS & no Sb/Br)", Manufacturer="Texas Instruments", Supplier Part Number 1=296-32409-2-ND, Accuracy(%)=2, Code_JEDEC=MO-203, ComponentLink1Description="Manufacturer URL", ComponentLink1URL=http://www.ti.com/, ComponentLink2Description=Datasheet, ComponentLink2URL=http://www.ti.com/general/docs/lit/getliterature.tsp?genericPartNumber=TLV70018&fileType=pdf, ComponentLink3Description="Package Specification", ComponentLink3URL=http://www.ti.com/litv/pdf/mpds025f, DatasheetVersion=SLVSA00D, Eco-Plan="Green (RoHS & no Sb/Br)", Fixed Output Options(V)=1.8, Iout(Max)(A)=0.2, Iq(Typ)(mA)=0.03, Mounting Technology="Surface Mount", PackageDescription="5-Pin Plastic Small-Outline, Body 2 x 1.25 mm, Pitch 0.65 mm", PackageReference=DCK5, PackageVersion=4093553-3/G, PartNumber=TLV70018DCKR, SubFamily="Single Channel LDO", Supplier 1=Digi-Key, Supplier 2=Digi-Key, Supplier 3=Digi-Key, Supplier 4=Newark, Supplier 5=Mouser, Supplier Part Number 2=296-32409-1-ND, Supplier Part Number 3=296-32409-6-ND, Supplier Part Number 4=55R7461, Supplier Part Number 5=595-TLV70018DCKR, Vdo(Typ)(mV)=175, Vin(Max)(V)=5.5, Vin(Min)(V)=2, Vout Adj(Max)(V)=1.8, Vout Adj(Min)(V)=1.8
U14: library part "Keller 7LD", "Keller Pressure/Temp", PDF=http://www.kelleramerica.com/pdf-library/Piezoresistive%20OEM%20Pressure%20Transmitters%20with%20I2C%20interface%20and%20embedded%20signal%20conditioning.pdf
U15: Supplier Part Number 1=DS3231S#-ND, Supplier 1=Digi-Key
U16: "Pressure/Temp", Supplier Part Number 1=223-1704-1-ND, Supplier 1=Digi-Key
U20: "8-Bit AVR Microcontroller with 8K Bytes of In-System Programmable Flash Memory", Code_JEDEC=MS-026-ABA, ComponentLink1Description="Manufacturer Link", ComponentLink1URL=http://www.atmel.com, ComponentLink2Description=Datasheet, ComponentLink2URL=http://www.atmel.com/dyn/resources/prod_documents/doc2486.pdf, DatasheetVersion=2486H-AVR-09/02, LatestRevisionDate=13-Apr-2006, LatestRevisionNote="IPC-7351 Footprint Added.", PackageDescription="32-Pin Thin Quad Flat Pack 0.8 mm Pitch", PackageReference=32A, PackageVersion="revB, Oct-2001", Published=17-Sep-2003, Publisher="Altium Limited"

## Free pads (board coordinates)
  round 1.016 smd paste-0.508 mask+0.127: 0(-3.725,-34.706) 0(0,0) 0(119.084,-36.119) 0(119.084,5.172)
  round 1.016 smd far side paste-0.508 mask+0.127: 0(0,0) 0(119.084,-36.119) 0(119.084,5.172)

## Via types
v1: diameter 0.559, hole 0.254, Top Layer to Bottom Layer, 141 vias
v2: diameter 0.762, hole 0.381, Top Layer to Bottom Layer, 6 vias
v3: diameter 0.5, hole 0.2, Top Layer to Bottom Layer, 4 vias
v4: diameter 1.27, hole 0.711, Top Layer to Bottom Layer, 1 vias

## Nets (pads, with @x,y where several pads share a name; then routed paths per layer and width w, separated by ;. In a path a pad name is that pad's centre, name@x,y a point inside that pad or via, vN(x,y) a via of type N, cw(c..) or ccw(c..) an arc to the next point about the centre after c; other vN are vias at no path point)
AGND: C1.2 C4.2 C5.2 C6.2 C9.1 C10.2 C16.1 C17.2 C19.2 C20.2 C21.2 C22.2 C24.2 C25.2 C26.2 C27.2 C28.2 C31.2 C32.2 C33.2 C37.2 C38.2 P2.3 P3.3 P11.1 P12.3 P14.3 R1.1 R7.1 R25.2 U1.1 U1.3 U1.7 U1.15 U1.31 U1.32 U1.33 U2.18 U2.27 U2.29 U4.2 U5.1 U5.3 U5.7 U5.15 U5.31 U5.32 U5.33 U6.2 U7.2 U9.2 | length 83
  Top Layer w0.152: C16.1@105.727,-33.258 105.727,-33.602 v1(106.806,-34.681) ; v1@106.908,-30.668 107.136,-30.896 U2.18@108.346,-30.896 ; U2.27@111.146,-32.896 U2.29@111.146,-31.696 ; C10.2@114.156,-29.103 115.226,-29.103 115.645,-28.684 115.645,-27.899 v1@115.391,-27.645 ; v1@116.022,-34.406 R1.1@116.022,-33.182
  Top Layer w0.305: R7.1@106.917,-24.839 106.917,-23.597 v1(107.771,-22.743)
  Bottom Layer w0.152: C21.2@101.187,-0.289 101.187,0.727 ; v1(101.701,-3.591) 101.914,-3.805 C38.2@101.914,-7.477 ; U9.2@103.869,-4.142 103.869,-3.225 ; C37.2@104.265,-2.829 v1@104.265,-2.094 ; 106.707,-24.574 U1.32@107.211,-24.574 ; v1@107.06,-2.575 107.06,-3.475 107.451,-3.475 107.746,-3.769 107.746,-4.175 107.861,-4.29 U5.31@108.354,-4.29 ; U1.31@107.211,-25.074 106.634,-25.074 106.634,-24.501 106.435,-24.303 C1.2@105.688,-24.303 105.688,-23.429 106.374,-22.743 v1(107.771,-22.743) 108.406,-22.743 ; 107.767,-3.79 U5.32@108.354,-3.79 ; U1.1@107.961,-23.824 107.961,-23.188 108.406,-22.743 ; C20.2@108.045,0.727 U4.2@106.593,0.727 101.187,0.727 ; U1.33@108.961,-25.574 U1.3@108.961,-23.824 C4.2@108.961,-22.287 ; 108.961,-22.743 108.406,-22.743 ; U5.1@109.104,-3.04 109.104,-1.7 109.498,-1.305 C22.2@109.95,-1.305 ; U5.33@110.104,-4.79 U5.3@110.104,-3.04 C22.2@110.104,-1.459 ; U1.7@110.961,-23.824 110.961,-23.048 113.806,-23.048 C6.2@114.274,-23.515 ; U5.7@112.104,-3.04 112.104,-2.205 v1@112.699,-1.61 ; U1.15@112.211,-27.574 113.111,-27.574 113.343,-27.807 v1(113.343,-28.839) ; C26.2@112.52,-9.433 113.588,-9.433 v1(113.867,-9.154) ; U5.15@113.354,-6.79 114.196,-6.79 v1@114.858,-7.452 ; C27.2@113.775,-15.006 C24.2@115.68,-15.006 ; C28.2@114.791,-2.941 v1@115.533,-2.941 ; R25.2@115.06,-13.17 115.06,-12.354 C32.2@115.06,-11.338 ; 101.187,0.727 101.167,0.727 101.142,0.752 101.142,1.698 C19.2@101.187,1.743 101.187,0.727
  Bottom Layer w0.203: v1@103.428,-31.887 C5.2@104.124,-31.191 ; C33.2@106.394,-13.243 C31.2@106.394,-11.338 ; v1@114.791,-21.533 U6.2@114.791,-20.412 ; 114.807,-21.828 C25.2@115.807,-22.828
  Bottom Layer w0.305: C5.2@104.124,-31.191 C5.2@104.124,-30.896 ; 106.4,-12.354 U7.2@111.927,-12.354 115.06,-12.354 ; U6.2@114.791,-20.412 114.791,-15.132 ; C25.2@115.807,-22.895 C25.2@115.807,-22.828
  other v1: 116.001,-34.427 103.352,-31.912 107.035,-30.795 115.26,-27.645 112.775,-23.022 114.807,-21.549 114.807,-15.682 114.477,-12.38 114.909,-7.554 115.569,-2.905 107.111,-2.524 104.342,-2.016 109.041,-1.737 112.775,-1.61 103.352,0.752
  other v3: 109.796,-31.446 110.896,-31.446 109.796,-30.346 110.896,-30.346
BATV: R20.1 R21.2 U20.22 | length 6.5
  Bottom Layer w0.203: U20.22@28.697,-4.109 28.697,-7.905 29.154,-8.362 29.154,-8.925 R21.2@29.154,-10.449
BCLK_P: P1.9 U1.24 | length 48.1
  Top Layer w0.152: v1(78.815,-7.579) 79.044,-7.579 v1(81.05,-5.572)
  Bottom Layer w0.152: P1.9@76.234,-7.579 v1(78.815,-7.579) ; v1(81.05,-5.572) 82.524,-7.046 82.524,-15.758 86.368,-19.603 86.368,-20.638 86.949,-21.219 90.259,-21.219 91.398,-22.358 91.398,-22.65 93.065,-24.318 98.855,-24.318 103.362,-28.824 U1.24@107.961,-28.824
BCLK_R: P10.9 U5.24 | length 75.8
  Top Layer w0.254: v1(47.675,-3.998) 47.675,-3.566 49.478,-1.762 52.663,-1.762 55.076,0.651 95.316,0.651 104.866,-8.9 v1@108.305,-8.9
  Bottom Layer w0.152: v1@108.305,-8.939 109.104,-8.939 U5.24@109.104,-8.04
  Bottom Layer w0.254: P10.9@42.782,-7.528 45.846,-7.528 47.7,-5.674 v1@47.7,-4.023
  other v1: 108.305,-8.951
BURN: Q2.1 U20.12 | length 79.9
  Top Layer w0.152: v1@16.696,-27.518 17.204,-28.026 39.97,-28.026 41.131,-26.865 41.131,-6.088 38.759,-3.717 38.759,-2.464 37.702,-1.407 36.703,-1.407 35.713,-0.416 v1(35.127,-0.416)
  Bottom Layer w0.152: Q2.1@-3.073,-30.53 9.117,-30.53 9.737,-31.15 13.055,-31.15 v1(16.687,-27.518)
  Bottom Layer w0.203: U20.12@31.997,-1.309 33.531,-1.309 34.424,-0.416 v1@35.035,-0.416
BURN_GND: P20.1 P30.1 Q2.3 | length 26.9
  Top Layer w0.152: v1(4.123,-27.975) 10.626,-27.975 14.41,-31.76 P20.1@14.41,-35.443
  Bottom Layer w0.152: Q2.3@-3.573,-29.23 -3.573,-26.4 P30.1@-3.624,-26.35 -2.328,-26.35 -0.719,-27.959 4.107,-27.959 v1(4.123,-27.975)
BURN_GND_REC: P18.2 Q1.3 | length 2.8
  Bottom Layer w0.203: Q1.3@70.611,0.615 70.611,1.616 P18.2@71.881,2.886
BURN_REC: P10.5 Q1.1 | length 46.8
  Bottom Layer w0.152: P10.5@42.782,-17.688 48.437,-17.688 50.52,-15.605 50.52,-6.436 54.863,-2.093 57.632,-2.093 59.156,-0.569 59.156,2.2 59.46,2.505 62.414,2.505 63.836,1.082 64.274,1.082 64.855,0.502 64.855,0.064 65.125,-0.206 65.125,-0.652 65.615,-1.142 66.061,-1.142 66.656,-1.737 70.789,-1.737 71.111,-1.415 Q1.1@71.111,-0.685
C1N: C8.1 U2.26 | length 8.8
  Top Layer w0.152: U2.26@110.746,-32.896 110.746,-33.896 111.632,-34.782 114.248,-34.782 115.213,-33.817 115.213,-32.217 115.518,-31.912 C8.1@116.022,-31.912
CLOCKBAT: P1.VBat P10.VBat R18.1 R19.2 U15.14 | length 151.3
  Top Layer w0.152: v1@19.338,-31.328 21.065,-31.328 25.434,-35.697 48.395,-35.697 49.869,-34.224 49.869,-29.575 45.805,-25.511 v1(45.805,-21.32)
  Bottom Layer w0.152: v1(19.211,-31.252) 19.289,-31.174 19.289,-30.909 22.73,-27.467 U15.14@23.455,-27.467 ; R18.1@22.871,-15.351 R19.2@22.871,-16.748 24.418,-16.748 25.688,-18.018 25.688,-27.403 25.599,-27.493 U15.14@23.455,-27.493 ; v1@45.703,-21.422 v1(45.805,-21.32) 45.882,-21.243 45.882,-21.052 45.906,-21.028 45.906,-19.149 45.817,-19.06 40.344,-19.06 39.785,-18.501 39.785,-17.002 40.376,-16.412 46.662,-16.412 47.227,-15.846 47.227,-8.874 53.653,-2.448 53.653,-1.915 52.739,-1 48.167,-1 47.608,-0.442 P10.VBat@47.608,2.378 47.608,3.902 48.599,4.892 53.098,4.892 53.302,4.689 54.614,4.689 54.818,4.892 67.232,4.892 67.969,4.156 80.375,4.156 80.806,3.725 80.806,2.581 P1.VBat@81.009,2.378
CS: P25.2 U20.14 | length 21.8
  Top Layer w0.152: P25.2@29.641,-18.336 29.641,-15.224 31.622,-13.243 31.622,-10.322 35.051,-6.893 v1(35.051,-2.067)
  Bottom Layer w0.203: U20.14@31.997,-2.309 34.809,-2.309 v1@35.178,-1.94
CS_P: P1.10 P8.2 | length 38.3
  Top Layer w0.152: v1(78.891,-5.064) 77.037,-6.919 77.037,-14.361 80.263,-17.587 80.263,-20.863 81.787,-22.387 91.998,-22.387 93.194,-21.191 P8.2@93.194,-17.447
  Bottom Layer w0.152: P1.10@76.259,-5.064 v1(78.891,-5.064)
CS_R: P10.10 P17.2 | length 27.2
  Top Layer w0.203: v1@45.338,-4.988 53.72,-4.988 61.063,-12.331 P17.2@61.063,-18.209
  Bottom Layer w0.254: P10.10@42.782,-4.988 v1@45.313,-4.988
  other v1: 45.338,-4.963
D+: P13.3 P15.1 | length 29.4
  Top Layer w0.203: P15.1@52.704,-34.96 54.457,-33.208 57.992,-33.208 70.886,-20.314 70.886,-16.448 P13.3@69.579,-16.448
D+P: P6.3 P7.1 | length 28.5
  Top Layer w0.152: P7.1@86.105,-34.96 87.527,-33.538 88.696,-33.538 103.326,-18.907 103.326,-15.843 102.915,-15.432 P6.3@101.964,-15.432
D-: P13.2 P15.2 | length 29
  Top Layer w0.203: P15.2@54.688,-34.96 56.743,-34.96 71.475,-20.228 71.475,-16.113 71.159,-15.798 P13.2@69.579,-15.798
D-P: P6.2 P7.2 | length 28.1
  Top Layer w0.152: P7.2@88.089,-34.96 103.885,-19.164 103.885,-15.656 103.011,-14.782 P6.2@101.964,-14.782
DGND: C7.1 C13.2 C14.2 C15.2 C29.1 C30.2 C34.1 C35.1 C39.2 C40.2 C42.1 C43.1 C47.2 C51.1 C53.1 C63.1 C64.1 C65.2 D1.K D3.K D4.K D5.K P1.GND P4.1 P6.5 P8.6 P9.1 P10.GND P11.2 P13.5 P16.1 P17.6 P21.2 P22.3 P24.1 P25.6 P26.1 P27.6 P28.2 P28.10 P29.5 Q1.2 Q2.2 R9.1 R12.1 R16.1 R19.1 R21.1 U3.2 U8.2 U10.2 U12.2 U14.5 U15.5 U15.6 U15.7 U15.8 U15.9 U15.10 U15.11 U15.12 U15.13 U16.1 U20.3 U20.5 U20.21 U20.33 | length 325.9
  Top Layer w0.152: D5.K@23.034,3.165 23.034,4.077 26.24,4.077 26.542,3.775 26.542,2.167 26.84,1.87 27.26,1.87 27.514,2.124 v1(28.701,2.124) ; D4.K@24.786,5.172 24.786,5.692 24.977,5.883 27.736,5.883
  Top Layer w0.203: U14.5@7.73,-3.845 14.096,-3.845 15.62,-2.321 C53.1@15.859,-2.321 ; v2(13.293,-10.602) 16.518,-13.827 16.518,-17.215 17.549,-18.245 P26.1@18.779,-18.245 ; C53.1@15.985,-2.195 U16.1@15.985,0.473 ; P25.6@25.208,-18.463 25.208,-16.075 33.552,-7.731 v1@33.552,-4.531 ; 27.736,5.883 28.701,4.918 v1(28.701,2.124) ; R16.1@39.662,-32.912 39.862,-32.712 39.862,-31.897 ; C39.2@39.862,-31.023 39.862,-31.897 ; U10.2@42.995,-32.023 39.988,-32.023 39.862,-31.897 ; v1@47.878,-25.41 52.196,-25.41 56.663,-20.943 P17.6@56.663,-18.209 ; C42.1@48.274,-33.039 C40.2@48.274,-31.007 ; D3.K@50.338,3.648 52.526,3.648 v1@54.025,5.146 ; v1@56.133,-32.293 58.114,-32.293 68.519,-21.888 68.519,-17.748 P13.5@69.579,-17.748 ; P9.1@62.532,-7.274 62.532,-3.542 v1(65.633,-0.442) ; R9.1@76.691,-25.347 77.555,-25.347 77.683,-25.475 ; C15.2@76.701,-34.605 v1(77.698,-34.605) 78.713,-34.605 C14.2@78.723,-34.594 ; v1@77.683,-34.594 C14.2@78.723,-34.594 ; U3.2@77.683,-28.803 77.683,-25.475 ; C13.2@78.723,-25.674 77.882,-25.674 77.683,-25.475 ; v1@78.841,3.622 D1.K@82.054,3.622 ; v1@82.752,-2.067 82.752,-3.007 88.794,-9.049 P8.6@88.794,-17.447 ; v1@82.752,-2.042 82.981,-1.813 86.691,-1.813 P4.1@91.39,-6.512 ; v1@83.209,-34.96 83.209,-34.579 84.784,-33.004 88.391,-33.004 96.798,-24.597 96.798,-17.825 97.891,-16.732 P6.5@101.964,-16.732
  Top Layer w0.305: v1@77.683,-34.594 U3.2@77.683,-28.803
  Bottom Layer w0.152: Q2.2@-4.073,-30.53 -4.027,-30.576 -4.027,-30.924 -3.141,-31.811 v1(-1.668,-31.811) ; v1(12.531,-20.152) 12.531,-17.714 13.496,-16.748 R19.1@21.171,-16.748 ; C63.1@25.779,4.933 25.779,5.298 26.415,5.934 34.543,5.934 34.924,5.553 C64.1@34.924,4.933 ; R21.1@27.454,-10.449 27.454,-11.488 27.812,-11.846 27.812,-13.031 38.667,-23.886 v1(38.769,-23.886) ; U20.33@28.697,-0.809 U20.3@28.697,0.991 ; U20.33@29.697,-1.309 U20.5@29.697,0.991 ; C51.1@30.489,-22.625 C51.1@30.575,-22.54 30.575,-29.918 30.664,-30.007 U15.5@32.825,-30.007 ; P11.2@98.662,4.156 98.662,4.511 99.703,5.553 P22.3@111.235,5.553
  Bottom Layer w0.203: C35.1@-0.144,-8.201 -0.106,-8.163 U8.2@2.085,-8.163 ; C34.1@7.403,-6.893 7.403,-7.998 7.238,-8.163 7.795,-8.163 7.834,-8.202 R12.1@7.834,-9.179 ; C47.2@14.588,-5.003 15.604,-5.003 C43.1@16.62,-5.003 ; U12.2@15.604,0.403 15.604,1.346 16,1.742 C30.2@16,1.997 ; v1(21.395,-33.868) 21.421,-33.843 22.735,-33.843 U15.13@22.735,-28.763 ; U20.3@28.697,0.991 28.697,1.874 28.701,1.87 v1(28.701,2.124) ; U20.33@29.197,-1.809 U20.21@29.197,-4.109 29.197,-7.135 29.478,-7.416 C65.2@29.955,-7.416 ; v1(30.615,-35.189) 30.683,-35.121 30.797,-35.121 31.989,-33.928 32.105,-33.928 U15.5@32.105,-30.033 ; v1@42.782,-34.697 P10.GND@42.782,-32.928 ; v1@65.464,-0.391 65.794,-0.391 66.81,-1.407 69.671,-1.407 70.111,-0.967 Q1.2@70.111,-0.685 ; C29.1@68.566,-27.797 69.29,-27.797 v1@70.154,-28.661 ; P1.GND@76.183,-32.928 76.183,-33.09 v1(77.698,-34.605) ; v1@98.119,-34.681 99.643,-33.157 C7.1@99.643,-29.182 ; P22.3@111.235,5.553 111.362,5.426 P16.1@111.362,1.616
  Bottom Layer w0.305: -2.125,-10.182 C35.1@-0.144,-8.201 ; U8.2@2.085,-8.163 7.238,-8.163
  Bottom Layer w0.356: v2@15.604,-5.003 U12.2@15.604,0.403
  Bottom Layer w0.381: P21.2@-3.811,-13.878 -2.125,-12.192 -2.125,-10.182
  other v1: 83.209,-34.986 98.119,-34.757 42.782,-34.741 56.133,-32.369 48.284,-31.988 40.559,-31.963 70.217,-28.737 47.853,-25.461 33.527,-4.582 82.778,-2.067 78.891,3.648 54.025,5.197 30.463,5.95
  other v2: 15.62,-4.988
DTR: C62.2 P29.1 | length 16.5
  Bottom Layer w0.203: P29.1@-3.827,-6.004 -5.335,-4.496 -5.335,5.553 -4.827,6.061 -2.074,6.061 -1.785,5.771 C62.2@-1.785,5.35
HALL: P22.2 U20.1 | length 96.6
  Bottom Layer w0.203: U20.1@27.697,0.991 26.151,0.991 24.764,2.378 24.764,5.68 25.641,6.557 112.771,6.557 P22.2@113.775,5.553
I2SDIN_P: P1.22 U1.26 | length 13.5
  Bottom Layer w0.152: P1.22@95.741,-22.768 99.618,-22.768 104.424,-27.574 U1.26@107.211,-27.574
I2SDIN_R: P10.22 U5.26 | length 83
  Top Layer w0.152: v1(70.865,-3.718) 70.865,-5.064 71.703,-5.903 72.777,-5.903 73.354,-5.326 73.354,-3.236 76.072,-0.518 94.792,-0.518 106.273,-11.999 108.709,-11.999 110.006,-10.701 110.006,-9.789 107.365,-7.147 v1(107.136,-7.147)
  Bottom Layer w0.152: P10.22@62.34,-22.768 70.179,-22.768 70.179,-20.317 70.833,-19.664 70.833,-12.645 70.814,-12.626 v1@70.814,-3.667 ; v1@107.187,-7.122 107.519,-6.79 U5.26@108.354,-6.79
I2SDOUT_P: P1.13 U1.25 | length 54.4
  Bottom Layer w0.152: P1.13@95.741,0.092 93.547,0.092 91.541,-1.915 89.949,-1.915 89.618,-2.245 87.095,-2.245 86.764,-1.915 85.172,-1.915 85.096,-1.839 84.657,-1.839 83.743,-2.753 87.883,-6.893 87.883,-12.659 91.972,-16.748 91.972,-22.794 93.141,-23.962 100.207,-23.962 104.319,-28.074 U1.25@107.211,-28.074 U1.25@107.208,-28.077
I2SDOUT_R: P10.13 U5.25 | length 51.7
  Top Layer w0.254: v1(62.305,1.387) 62.635,1.057 95.484,1.057 104.78,-8.239 106.984,-8.239 v1(107.009,-8.265)
  Bottom Layer w0.152: v1@107.035,-8.239 107.984,-7.29 U5.25@108.354,-7.29
  Bottom Layer w0.254: P10.13@62.34,0.092 v1@62.34,1.352
IMU_INT: P30.2 U20.11 | length 54.6
  Top Layer w0.152: v1(11.591,-8.709) 11.686,-8.709 11.998,-8.398 12.105,-8.398 12.505,-7.998 15.252,-7.998 16.865,-6.385 16.865,-4.506 17.861,-3.509 17.956,-3.509 18.447,-3.018 18.447,-2.923 19.557,-1.813 29.971,-1.813 32.187,0.402 33.527,0.402 v1(34.365,1.241)
  Bottom Layer w0.152: P30.2@-3.624,-23.81 7.718,-12.468 9.582,-12.468 11.731,-10.32 11.731,-10.193 11.591,-10.053 v1(11.591,-8.709)
  Bottom Layer w0.203: U20.11@31.997,-0.809 32.885,-0.809 33.507,-0.188 34.137,-0.188 34.289,-0.035 34.289,1.164 v1(34.365,1.241)
IN_L: C36.2 U5.14 | length 6.9
  Bottom Layer w0.152: U5.14@113.354,-6.29 115.195,-6.29 116.823,-7.919 C36.2@116.823,-10.688
IN_L2: C2.2 U1.14 | length 5.2
  Bottom Layer w0.152: U1.14@112.211,-27.074 113.068,-27.074 114.07,-28.077 114.07,-29.347 114.705,-29.982 C2.2@115.478,-29.982
IN_R: C41.2 U5.13 | length 2.9
  Bottom Layer w0.152: U5.13@113.354,-5.79 C41.2@116.23,-5.79
IN_R2: C3.2 U1.13 | length 5.1
  Bottom Layer w0.152: U1.13@112.211,-26.574 113.025,-26.574 113.425,-26.974 C3.2@117.144,-26.974
INTA: R22.2 U15.3 U20.32 | length 52.7
  Top Layer w0.152: v1@15.239,-6.639 16.255,-5.623 16.255,-3.922 17.277,-2.9 17.704,-2.9 17.838,-2.766 17.838,-2.34 19.253,-0.924 22.478,-0.924 24.002,0.6 v1(25.272,0.6)
  Top Layer w0.203: v1@15.239,-7.02 v1@15.239,-6.639
  Bottom Layer w0.203: v1(15.223,-6.877) 15.223,-8.874 17.915,-11.567 22.919,-11.567 36.178,-24.826 36.178,-27.188 36.059,-27.307 35.461,-27.307 R22.2@35.137,-27.631 34.998,-27.493 U15.3@32.105,-27.493 ; v1(25.272,0.6) 25.681,0.191 U20.32@26.897,0.191
LED1: R27.1 U20.2 | length 10
  Top Layer w0.152: R27.1@21.462,3.941 22.349,3.941 22.919,4.511 26.694,4.511 27.05,4.156 v1(27.05,2.378)
  Bottom Layer w0.203: v1(27.05,2.378) 27.685,2.378 28.197,1.866 U20.2@28.197,0.991
LED2: R29.1 U20.26 | length 7.9
  Top Layer w0.203: v1(22.097,-0.416) 22.39,-0.123 R29.1@22.39,1.616
  Bottom Layer w0.203: v1(22.097,-0.416) 24.49,-2.809 U20.26@26.897,-2.809
LED_P: P1.17 R11.1 | length 25.3
  Top Layer w0.203: R11.1@88.047,3.292 v1(93.979,3.292)
  Bottom Layer w0.203: v1@93.928,3.318 96.138,3.318 99.237,0.219 99.237,-8.29 97.459,-10.068 P1.17@95.741,-10.068
LED_R: P10.17 R17.1 | length 32.5
  Top Layer w0.203: R17.1@46.735,0.639 48.095,0.639 49.123,1.667 v1(59.841,1.667)
  Bottom Layer w0.203: v1@59.765,1.692 59.8,1.657 59.8,-0.756 60.273,-1.229 64.515,-1.229 65.15,-1.864 65.15,-9.459 64.54,-10.068 P10.17@62.34,-10.068
LRCLK_P: P1.23 U1.23 | length 14.9
  Bottom Layer w0.152: P1.23@95.741,-25.308 99.161,-25.308 103.275,-29.423 108.279,-29.423 108.461,-29.241 U1.23@108.461,-28.824
LRCLK_R: P10.23 U5.23 | length 79.3
  Top Layer w0.254: v1(72.567,-5.395) 72.567,-3.337 75.742,-0.162 94.979,-0.162 106.434,-11.618 108.587,-11.618 109.651,-10.554 109.651,-9.992 109.346,-9.687 v1(107.746,-9.687)
  Bottom Layer w0.152: v1(107.746,-9.687) 109.194,-9.687 109.604,-9.277 U5.23@109.604,-8.04
  Bottom Layer w0.254: P10.23@62.34,-25.308 68.528,-25.308 72.668,-21.168 v1@72.668,-5.445
MCLK_P: P1.11 U1.21 | length 57.5
  Bottom Layer w0.152: P1.11@76.183,-2.448 79.755,-2.448 79.933,-2.626 79.933,-23.556 83.006,-26.629 100.05,-26.629 103.251,-29.829 108.736,-29.829 109.461,-29.105 U1.21@109.461,-28.824
MCLK_R: P10.11 U5.21 | length 75.2
  Top Layer w0.254: v1(52.552,-2.448) 55.244,0.244 95.147,0.244 106.603,-11.211 108.203,-11.211 v1(109.092,-10.322)
  Bottom Layer w0.152: v1@109.194,-10.144 110.604,-8.734 U5.21@110.604,-8.04
  Bottom Layer w0.254: P10.11@42.782,-2.448 v1(52.552,-2.448)